# EAGLE board plen2_headboard (EAGLE 6.6.0)
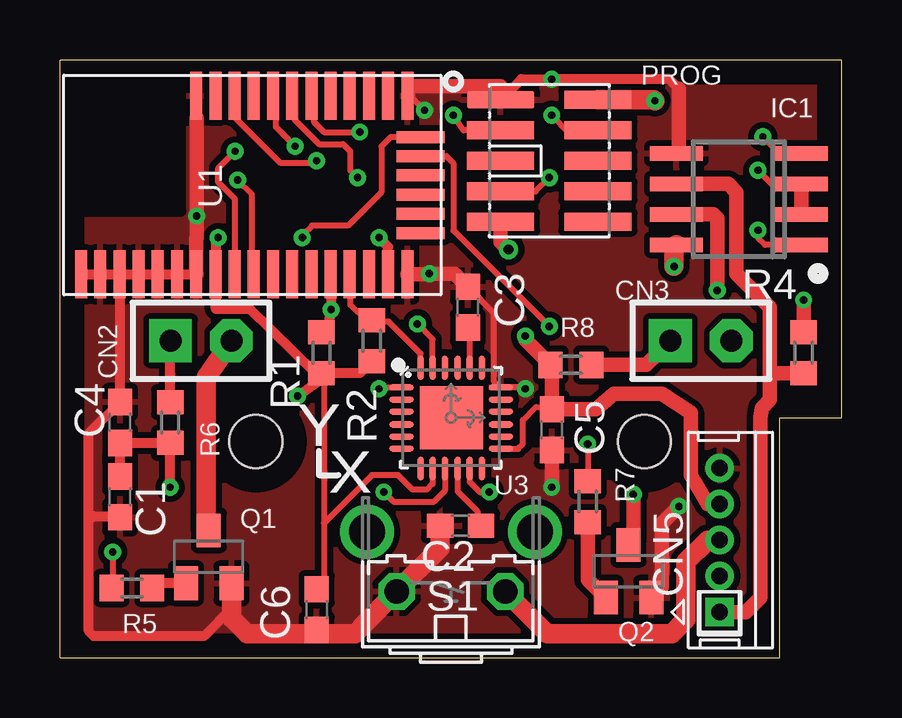
[diagram p0: board, top side]
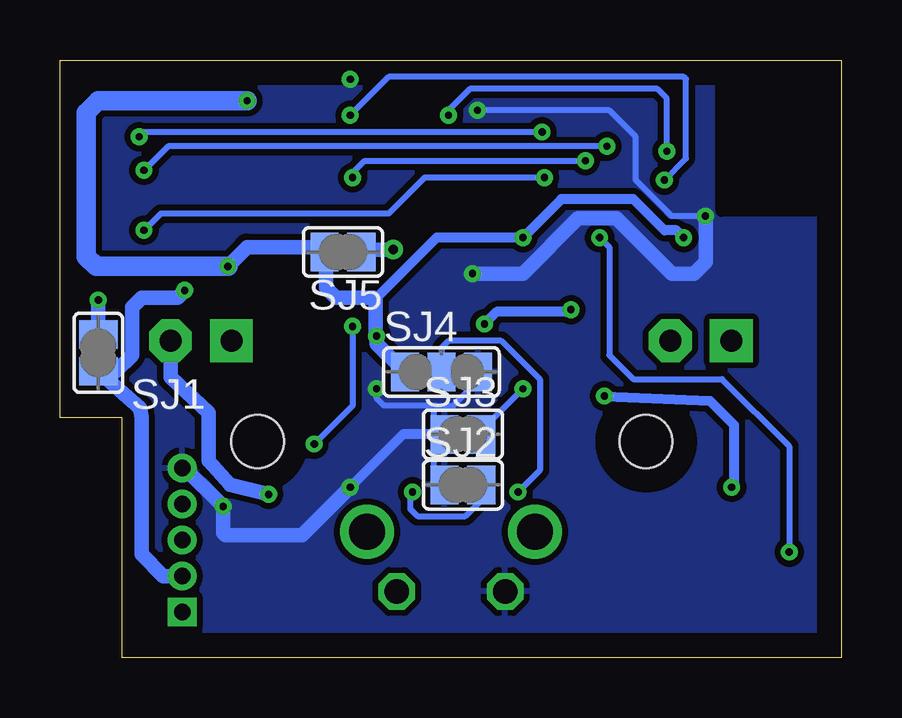
[diagram p1: board, bottom side, seen from below]

Size 32.6 x 24.9 mm. Coordinates in mm from the lower left corner, seen from the top.
Outline: 0,0 30,0 30,10 32.6,10 32.6,24.9 0,24.9 0,0
Copper layers (1*16): Top 0.035mm / dielectric 1.5mm / Bottom 0.035mm
Design rules "default": minimum track width 10mil, minimum drill 24mil, track to track 8mil, track to pad 8mil, pad to pad 8mil, via to via 8mil, smd to smd 8mil, copper to edge 40mil, drill to drill 8mil, minimum pad ring 10mil, minimum via ring 8mil, stop-mask expansion 4mil, vias tented up to drill 0mil, thermal gap 10mil
Net classes: 1 power: width 0.254 mm, drill 0.33 mm, clearance 0.152 mm
Holes 2.2 mm at 8.17,9 24.36,9

## Footprints (pad centres in the part's own frame; a part is rotated, then mirrored left to right if it is on the bottom)
C0603 = smd 1.1 x 1: 1 -0.85,0; 2 0.85,0
SIP-100-02 = drill 0.914 pad 1.778 square: 1 -1.27,0 | drill 0.914 pad 1.778 octagon: 2 1.27,0
ZH-5 = drill 0.7 square: 1 -4.5,0 | drill 0.7: 2 -3,0; 3 -1.5,0; 4 0,0; 5 1.5,0
SO08SHORT = smd 0.6 x 2.2: 1 -1.905,-2.6; 2 -0.635,-2.6; 3 0.635,-2.6; 4 1.905,-2.6; 5 1.905,2.6; 6 0.635,2.6; 7 -0.635,2.6; 8 -1.905,2.6
FTSH-105-DV = smd 0.74 x 2.8: 1 -2.54,-2.03; 2 -2.54,2.03; 3 -1.27,-2.03; 4 -1.27,2.03; 5 0,-2.03; 6 0,2.03; 7 1.27,-2.03; 8 1.27,2.03; 9 2.54,-2.03; 10 2.54,2.03
SOT23-BEC = smd 1 x 1.4: B -0.95,-1.1; C 0,1.1; E 0.95,-1.1
R0603 = smd 1 x 1.1: 1 -0.85,0; 2 0.85,0
B3F-31XX = drill 1.016 octagon: 1 -2.261,-1.245; 2 2.261,-1.245 | drill 1.499 pad 2.159: 3 -3.505,1.245; 4 3.505,1.245
SJ = smd 1.168 x 1.6: 1 -0.762,0; 2 0.762,0
SJ-ON = smd 1.168 x 1.6: 1 -0.762,0; 2 0.762,0
SJ_2-ON = smd 1.168 x 1.6: 1 -1.524,0; 2 0,0; 3 1.524,0
BLE113-A = smd 2 x 0.5: AVDD -3.725,1.538; DVDD -3.725,-5.662; GND -3.725,7.138; GND@2 -3.725,6.338; GND@3 -3.725,5.537; GND@4 -3.725,4.737; GND@5 -3.725,3.938; GND@6 -3.725,3.138; GND@7 -3.725,2.337; GND@8 -3.725,-6.463; GND@9 3.725,-6.463; GND@10 3.725,2.337; NC -3.725,-4.862; NC@2 3.725,1.538; P0_0 3.725,-0.062; P0_1 3.725,-0.863; P0_2 3.725,-1.663; P0_3 3.725,-2.462; P0_4 3.725,-3.263; P0_5 3.725,-4.062; P0_6 3.725,-4.862; P0_7 3.725,-5.662; P1_6 -3.725,-2.462; P1_7 -3.725,-1.663; P2_0 -3.725,-0.863; P2_1 -3.725,-0.062; P2_2 -3.725,0.738; RESET 3.725,0.738; SCL -3.725,-3.263; SDA -3.725,-4.062 | smd 0.5 x 2: P1_0 2,-7.013; P1_1 1.2,-7.013; P1_2 0.4,-7.013; P1_3 -0.4,-7.013; P1_4 -1.2,-7.013; P1_5 -2,-7.013
QFN-24-4MM2 = smd 1.016 x 0.254: 1 -2.066,1.257; 2 -2.066,0.75; 3 -2.066,0.247; 4 -2.066,-0.287; 5 -2.066,-0.792; 6 -2.066,-1.297; 13 2.086,-1.297; 14 2.086,-0.792; 15 2.086,-0.287; 16 2.086,0.247; 17 2.086,0.75; 18 2.086,1.257 | smd 0.254 x 1.016: 7 -1.267,-2.122; 8 -0.762,-2.122; 9 -0.258,-2.122; 10 0.278,-2.122; 11 0.78,-2.122; 12 1.287,-2.122; 19 1.287,2.082; 20 0.78,2.082; 21 0.278,2.082; 22 -0.258,2.082; 23 -0.762,2.082; 24 -1.267,2.082 | smd 2.616 x 2.616: P$1 0.02,-0.01

## Placement (x,y rotation side)
C1  1u  [C0603]  2.5,6.7 270 top
C2  0.1u  [C0603]  16.7,5.5 180 top
C3  0.1u  [C0603]  17,14.6 90 top
C4  1u  [C0603]  2.5,9.8 90 top
C5  0.1u  [C0603]  20.5,9.5 270 top
C6  0.1u  [C0603]  10.7,2 270 top
CN2  CON-02  [SIP-100-02]  5.88,13.2 0 top
CN3  CON-02  [SIP-100-02]  26.72,13.2 0 top
CN5  [ZH-5]  27.5,6.4 90 top
IC1  MAX34SHORT  [SO08SHORT]  28.3,19.1 90 top
PROG  CONN_5-2-FTSH-V  [FTSH-105-DV]  20.4,20.7 270 top
Q1  BC817-40LT1SMD  [SOT23-BEC]  6.2,4.2 0 top
Q2  BC817-40LT1SMD  [SOT23-BEC]  23.7,3.6 0 top
R1  10k  [R0603]  10.9,12.7 270 top
R2  10k  [R0603]  13,13.2 270 top
R4  100  [R0603]  31,12.7 270 top
R5  [R0603]  3,2.9 0 top
R6  [R0603]  4.6,9.8 270 top
R7  [R0603]  22,6.5 270 top
R8  [R0603]  21.3,12.2 180 top
S1  [B3F-31XX]  16.3,4 0 top
SJ1  TERM  [SJ]  31,12.7 90 bottom
SJ2  SJ-ON  [SJ-ON]  15.8,7.2 0 bottom
SJ3  SJ-ON  [SJ-ON]  15.8,9.3 0 bottom
SJ4  SJ_2-ON  [SJ_2-ON]  16.7,11.9 0 bottom
SJ5  [SJ]  20.8,16.9 180 bottom
U1  BLE113-VISUAL-A  [BLE113-A]  8.02,19.69 90 top
U3  MPU-6050-1  [QFN-24-4MM2]  16.3,10 0 top

## Library data of the parts
C1-C6 R1 R2 R4-R8 = rcl
CN2 CN3 = con-headers-jp
CN5 = con-jst
IC1 = maxim
PROG = pel_misc
Q1 Q2 = transistor-npn
S1 = switch-omron; MPN: B3F-3100; OC_FARNELL: 959704; OC_NEWARK: 36M3582
SJ1-SJ5 = jumper
U1 = sf-bluegiga; ANTENNA: On-module ceramic chip antenna
U3 = Testing

## Nets
+3V3: C1.1 C4.1 C5.1 C6.1 CN5.4 IC1.8 PROG.2 R1.2 R2.2 R6.2 R8.2 SJ4.1 SJ5.2 U1.AVDD U1.DVDD U3.8 U3.13
ADO: SJ4.2 U3.9
AUX_SCL: U3.7
AUX_SDA: U3.6
CLKIN: SJ3.2 U3.1
DE/!RE: IC1.2 IC1.3 U1.P0_1
FSYNC: SJ2.2 U3.11
GND: C1.2 C2.2 C3.2 C4.2 C5.2 C6.2 CN5.5 IC1.5 PROG.1 Q1.E Q2.E S1.1 SJ2.1 SJ3.1 SJ4.3 U1.GND U1.GND@2 U1.GND@3 U1.GND@4 U1.GND@5 U1.GND@6 U1.GND@7 U1.GND@8 U1.GND@9 U1.GND@10 U3.18
INT: U3.12
N$3: C3.1 U3.20
N$5: C2.1 U3.10
N$7: R4.1 SJ1.2
N$10: Q1.B R5.2
N$11: CN2.2 Q1.C
N$13: CN2.1 R6.1
N$14: Q2.B R7.2
N$15: CN3.2 Q2.C
N$16: CN3.1 R8.1
N$17: CN5.3 S1.2
P1_0: R5.1 U1.P1_0
P1_1: R7.1 U1.P1_1
P1_2: U1.P1_2
P1_3: U1.P1_3
P1_4: U1.P1_4
P1_5: U1.P1_5
P1_6: U1.P1_6
P1_7: U1.P1_7
P2_0: U1.P2_0
P2_1: PROG.4 U1.P2_1
P2_2: PROG.3 U1.P2_2
PRG_VDD [power]: PROG.9 SJ5.1
RESET: PROG.7 U1.RESET
RS485_A: CN5.1 IC1.6 R4.2
RS485_B: CN5.2 IC1.7 SJ1.1
RX: IC1.1 U1.P0_2
SCL: R1.1 U1.SCL U3.23
SDA: R2.1 U1.SDA U3.24
TX: IC1.4 U1.P0_3

## Tracks (layer width: path | path; a pad name or v marks a point on that pad's centre or on a via)
+3V3  (via drill 0.3)
  Top 0.254: 18.42,8.68 U3.13 19.1,8.7 19.3,8.9 19.3,9.9 19.85,10.45 C5.1 | U3.8 15.54,7.24 15.3,7 14.7,7 14.1,7.6 13,7.6 11,5.6 | 11,5.6 11,3.15 C6.1 | 12.2,11.85 11,11.85 11,5.6
  Top 0.406: C1.1 2.52,8.93 C4.1 R6.2 v4.6,7.1 | R1.2 10.9,11.6 v9.9,10.9 | U1.DVDD 13.68,17.12 v13.3,17.5 | v6.6,17.5 6.48,17.38 U1.AVDD 6.48,14.62 6.5,14.53 7.9,14.53 10.65,11.85 R1.2 | R2.2 12.5,11.85 12.2,11.85 R1.2
  Top 0.61: CN5.4 27,6.4 26.3,7.6 26.3,10.2 25.1,11 23.1,11 22.35,10.35 C5.1 20.5,11.85 R8.2 19.4,13.25 v19.4,13.4
  Top 0.813: PROG.2 24.76,23.24 v24.8,23.2 | v25.6,16.3 25.6,17.09 IC1.8
  Bottom 0.406: v4.6,7.1 4.5,7.2 4.5,9.7 5.5,10.7 v9.9,10.9 | 19.45,14.95 16.9,17.5 v13.3,17.5 11.7,19.1 8.7,19.1 7.4,17.8 6.9,17.8 v6.6,17.5
  Bottom 0.61: v25.6,16.3 24.8,17.1 21.76,17.1 SJ5.2 21.5,16.84 21.5,15.4 21.1,15 19.5,15 19.45,14.95 19.45,13.45 v19.4,13.4 19.4,13.08 SJ4.1
  Bottom 0.813: v24.8,23.2 31,23.2 31.5,22.7 31.5,16.7 31.1,16.3 v25.6,16.3
ADO  (via drill 0.3)
  Top 0.254: v13.5,6.9 13.9,6.5 15.6,6.5 16.04,6.94 U3.9
  Bottom 0.254: v13.5,6.9 12.6,7.8 12.6,11.6 14.2,13.2 16.4,13.2 16.7,12.9 SJ4.2
CLKIN  (via drill 0.3)
  Top 0.254: v13.3,11.2 13.36,11.26 U3.1
  Bottom 0.254: v13.3,11.2 15.2,9.3
  Bottom 0.61: 15.2,9.3 SJ3.2
DE/!RE  (via drill 0.3)
  Top 0.254: 8.8,23.33 U1.P0_1 8.88,22.82 9,22.7 9,22.1 v9.8,21.3 | IC1.3 29.66,19.73 v29.1,20.3
  Top 0.61: IC1.3 IC1.2
  Bottom 0.254: v29.1,20.3 28.1,21.3 v9.8,21.3
FSYNC  (via drill 0.3)
  Top 0.254: U3.11 17.08,7.32 17.5,6.9 v17.9,6.9
  Bottom 0.254: v17.9,6.9 18,6.8 18,6.2 17.7,5.9 15.7,5.9 15.1,6.5 15.1,7.14 SJ2.2
GND  (via drill 0.3)
  Top 0.254: 14.59,23.41 v15.2,22.8 | C3.2 18.1,14.35 18.1,11.5 18.34,11.26 U3.18 19.34,11.26 v19.4,11.2
  Top 0.406: U1.GND U1.GND@2 U1.GND@3 | U1.GND@3 U1.GND@4 U1.GND@5 U1.GND@6 U1.GND@7 | Q1.E 7.15,2.05 6,0.9 1.4,0.9 1.2,1.1 1.2,5.7 | 1.2,5.7 1.4,5.9 2.47,5.9 C1.2 | 1.2,5.7 1.2,9.35 C4.2 2.48,10.77 U1.GND@3 | U1.GND@9 14.59,23.41 14.6,23.41 14.6,23.8 | PROG.1 19.23,24.1 v20.5,24.1 25.4,24.1 25.8,23.7 | 5.7,22.5 5.68,22.21 U1.GND@10
  Top 0.61: 18.32,23.41 PROG.1 18.37,23.8 14.6,23.8 | Q2.E 25.1,2.95 25.1,5.6 v25.8,6.3 | C5.2 v20.5,7.1 | 25.8,23.7 25.8,21.11 IC1.5 | U1.GND@7 5.68,17.48 5.7,17.5 v5.7,18.4 5.7,22.5 | U1.GND@8 15.37,15.96 v15.4,16 16.45,16 C3.2 | C6.2 10.7,1.1
  Top 0.813: Q1.E 7.15,1.65 7.8,1 10.6,1 | 10.6,1 12.3,1 12.58,1.28 12.58,1.3 S1.1 15.85,4.57 C2.2 | 10.7,1.1 10.6,1
  Bottom 0.254: v5.7,18.4 7.1,18.4 8.6,19.9 8.6,21.7 9.7,22.8 v15.2,22.8 | 16.91,10.49 17,10.5 19.1,10.5 19.4,10.8 v19.4,11.2 | 16.91,10.49 16.21,10.49 15.5,11.2 15.5,11.58 SJ4.3 | 16.91,10.49 17,10.4 17,9.8 16.56,9.36 SJ3.1 17,8.86 17,7.5 16.91,7.41 16.77,7.41 SJ2.1
  Bottom 0.406: v20.5,7.1 18.3,9.3 SJ3.1
  Bottom 0.61: CN5.5 27.4,7.9 v25.8,6.3 25.8,5.2 25.7,5.1 22.5,5.1 v20.5,7.1 | v5.7,18.4 5.68,18.08 5.68,16.5 6.18,16 7.1,16 9.4,18.3 11,18.3 13.3,16 v15.4,16
  pour Top (isolate 0.254): -0.1,-0.1 32.8,-0.1 32.8,25.1 -0.1,25.1
  pour Bottom (isolate 0.254): -0.2,-0.1 32.7,-0.1 32.7,25.1 -0.2,25.1
N$3
  Top 0.254: C3.1 17.08,13.33 U3.20
N$5
  Top 0.254: U3.10 16.58,6.92 17.4,6.1 17.4,5.7 C2.1
N$7  (via drill 0.3)
  Top 0.61: R4.1 v31,14.9
  Bottom 0.61: v31,14.9 SJ1.2
N$10
  Top 0.406: Q1.B 4.05,3.1 R5.2
N$11
  Top 0.813: CN2.2 6.1,11.65 6.1,5.4 Q1.C
N$13
  Top 0.406: R6.1 4.6,11.79 CN2.1
N$14
  Top 0.61: Q2.B 22,3.25 R7.2
N$15  (via drill 0.3)
  Top 0.61: Q2.C 23.9,4.9 v23.9,6.8
  Bottom 0.61: v23.9,6.8 25.5,7.2 26.4,8.2 26.4,10.2 27.99,11.69 CN3.2
N$16
  Top 0.61: R8.1 24.45,12.2 CN3.1
N$17
  Top 0.813: S1.2 20.32,1 25.5,1 26.1,1.6 26.1,4 27,4.9 CN5.3
P1_0  (via drill 0.3)
  Top 0.254: U1.P1_0 13.79,21.69 13.4,21.3 13.4,19.4 12,18 10.5,18 10.1,17.6 v10.1,17.5 | v2.2,4.4 2.2,2.95 R5.1
  Bottom 0.254: v10.1,17.5 9.7,17.1 9.7,12.6 8.7,11.6 5,11.6 2.2,8.8 v2.2,4.4
P1_1  (via drill 0.3)
  Top 0.254: U1.P1_1 16.11,20.89 16.4,20.6 16.4,17.8 v20.4,13.8 | v22,8.9 R7.1
  Bottom 0.254: v20.4,13.8 20.4,10.5 v22,8.9
P2_1  (via drill 0.3)
  Top 0.254: U1.P2_1 8,16.05 8,19.3 v7.4,19.9 | v20.5,22.6 21.2,21.9 22.36,21.9 PROG.4
  Bottom 0.254: v7.4,19.9 6.5,20.8 6.5,24.1 6.6,24.2 18.9,24.2 v20.5,22.6
P2_2  (via drill 0.3)
  Top 0.254: U1.P2_2 7.3,15.98 7.3,19.1 6.6,19.8 6.6,20.4 v7.3,21.1 | PROG.3 16.83,21.97 v16.4,22.6
  Bottom 0.254: v7.3,21.1 7.3,23.3 7.7,23.7 15.5,23.7 16.4,22.8 v16.4,22.6
PRG_VDD  (via drill 0.4)
  Top 0.61: PROG.9 18.37,17.33 v18.7,17
  Bottom 0.61: v18.7,17 19.94,17 SJ5.1
RESET  (via drill 0.3)
  Top 0.254: 18.44,19.5 PROG.7 19.83,19.43 v20.4,20 | v10.7,20.7 10.6,20.6 9.2,20.6 7.3,22.5 7.3,23.4 U1.RESET
  Bottom 0.254: v20.4,20 20.4,20.2 19.9,20.7 v10.7,20.7
RS485_A
  Top 0.61: CN5.1 28.6,1.9 29.2,2.5 29.2,10 29.25,10.4 29.6,10.75 29.6,11.8 | IC1.6 27.86,19.73 28.2,19.4 28.2,16 29.6,14.6 29.6,11.8 | R4.2 29.65,11.85 29.6,11.8
RS485_B  (via drill 0.3)
  Top 0.61: IC1.7 27.23,18.46 27.4,18.3 v27.4,15.3
  Bottom 0.61: CN5.2 28.3,3.4 29.2,4.3 29.2,10 29.26,10.4 SJ1.1 30.96,11.9 30.3,11.9 29.6,12.6 29.6,14.6 29.2,15 27.7,15 v27.4,15.3
RX  (via drill 0.3)
  Top 0.254: 9.7,23.4 U1.P0_2 9.68,22.82 9.8,22.7 9.8,22.4 10.8,21.4 11.8,21.4 12.1,21.1 12.1,20.3 v12.4,20 | IC1.1 29.41,17.2 29.1,17.5 v29.1,17.8
  Bottom 0.254: v29.1,17.8 28.4,18.5 18.9,18.5 17.4,20 v12.4,20
SCL  (via drill 0.3)
  Top 0.254: U1.SCL 11.3,15.95 | U3.23 15.54,13.26 v14.9,13.9
  Top 0.406: 11.3,15.95 v11.3,14.5 11.2,13.85 R1.1
  Bottom 0.406: v11.3,14.5 11.5,14.4 14.4,14.4 v14.9,13.9
SDA
  Top 0.254: U1.SDA 12.1,15.95 12.1,14.7 12.75,14.05 R2.1 13.05,14 13.7,14 15.03,12.67 U3.24
TX  (via drill 0.3)
  Top 0.254: 10.5,23.4 U1.P0_3 10.48,23.02 10.6,22.9 10.6,22.3 11,21.9 v12.5,21.9 | v29.3,21.7 30,21 IC1.4
  Bottom 0.254: v12.5,21.9 29.1,21.9 v29.3,21.7

## Text on the board
Top: THIS PCB LAYOUT IS PROVIDED BY THE COPYRIGHT HOLDERS AND CONTRIBUTORS "AS IS" / AND ANY EXPRESS OR IMPLIED WARRANTIES, INCLUDING, BUT NOT LIMITED TO, THE / IMPLIED WARRANTIES OF MERCHANTABILITY AND FITNESS FOR A PARTICULAR PURPOSE / ARE DISCLAIMED. IN NO EVENT SHALL <COPYRIGHT HOLDER> BE LIABLE FOR ANY / DIRECT, INDIRECT, INCIDENTAL, SPECIAL, EXEMPLARY, OR CONSEQUENTIAL DAMAGES / (INCLUDING, BUT NOT LIMITED TO, PROCUREMENT OF SUBSTITUTE GOODS OR SERVICES; / LOSS OF USE, DATA, OR PROFITS; OR BUSINESS INTERRUPTION) HOWEVER CAUSED AND / ON ANY THEORY OF LIABILITY, WHETHER IN CONTRACT, STRICT LIABILITY, OR TORT / (INCLUDING NEGLIGENCE OR OTHERWISE) ARISING IN ANY WAY OUT OF THE USE OF THIS / PCB LAYOUT, EVEN IF ADVISED OF THE POSSIBILITY OF SUCH DAMAGE.
tPlace: Y | X | U3
layer 125: PROG | IC1 | U1 | C3 | CN3 | R4 | R8 | CN2 | R1 | R2 | C5 | R6 | CN5 | C4 | R7 | C1 | Q1 | C2 | R5 | S1 | Q2 | C6
layer 126: SJ5 | SJ2 | SJ4 | SJ1 | SJ3